# Altium PCB RELIA.PcbDoc (part 3 of 3)
Units mm, origin at the board's own origin, x right, y up, seen from the top; angles counter-clockwise.
Board outline 64.01 x 60 mm, 4 copper layers (Top Layer, GND, POWER, Bottom Layer), stack 1.457 mm thick; 143 components, 99 nets, 570 pads, 325 vias.
Unrouted connection lines stored in the file: 1.
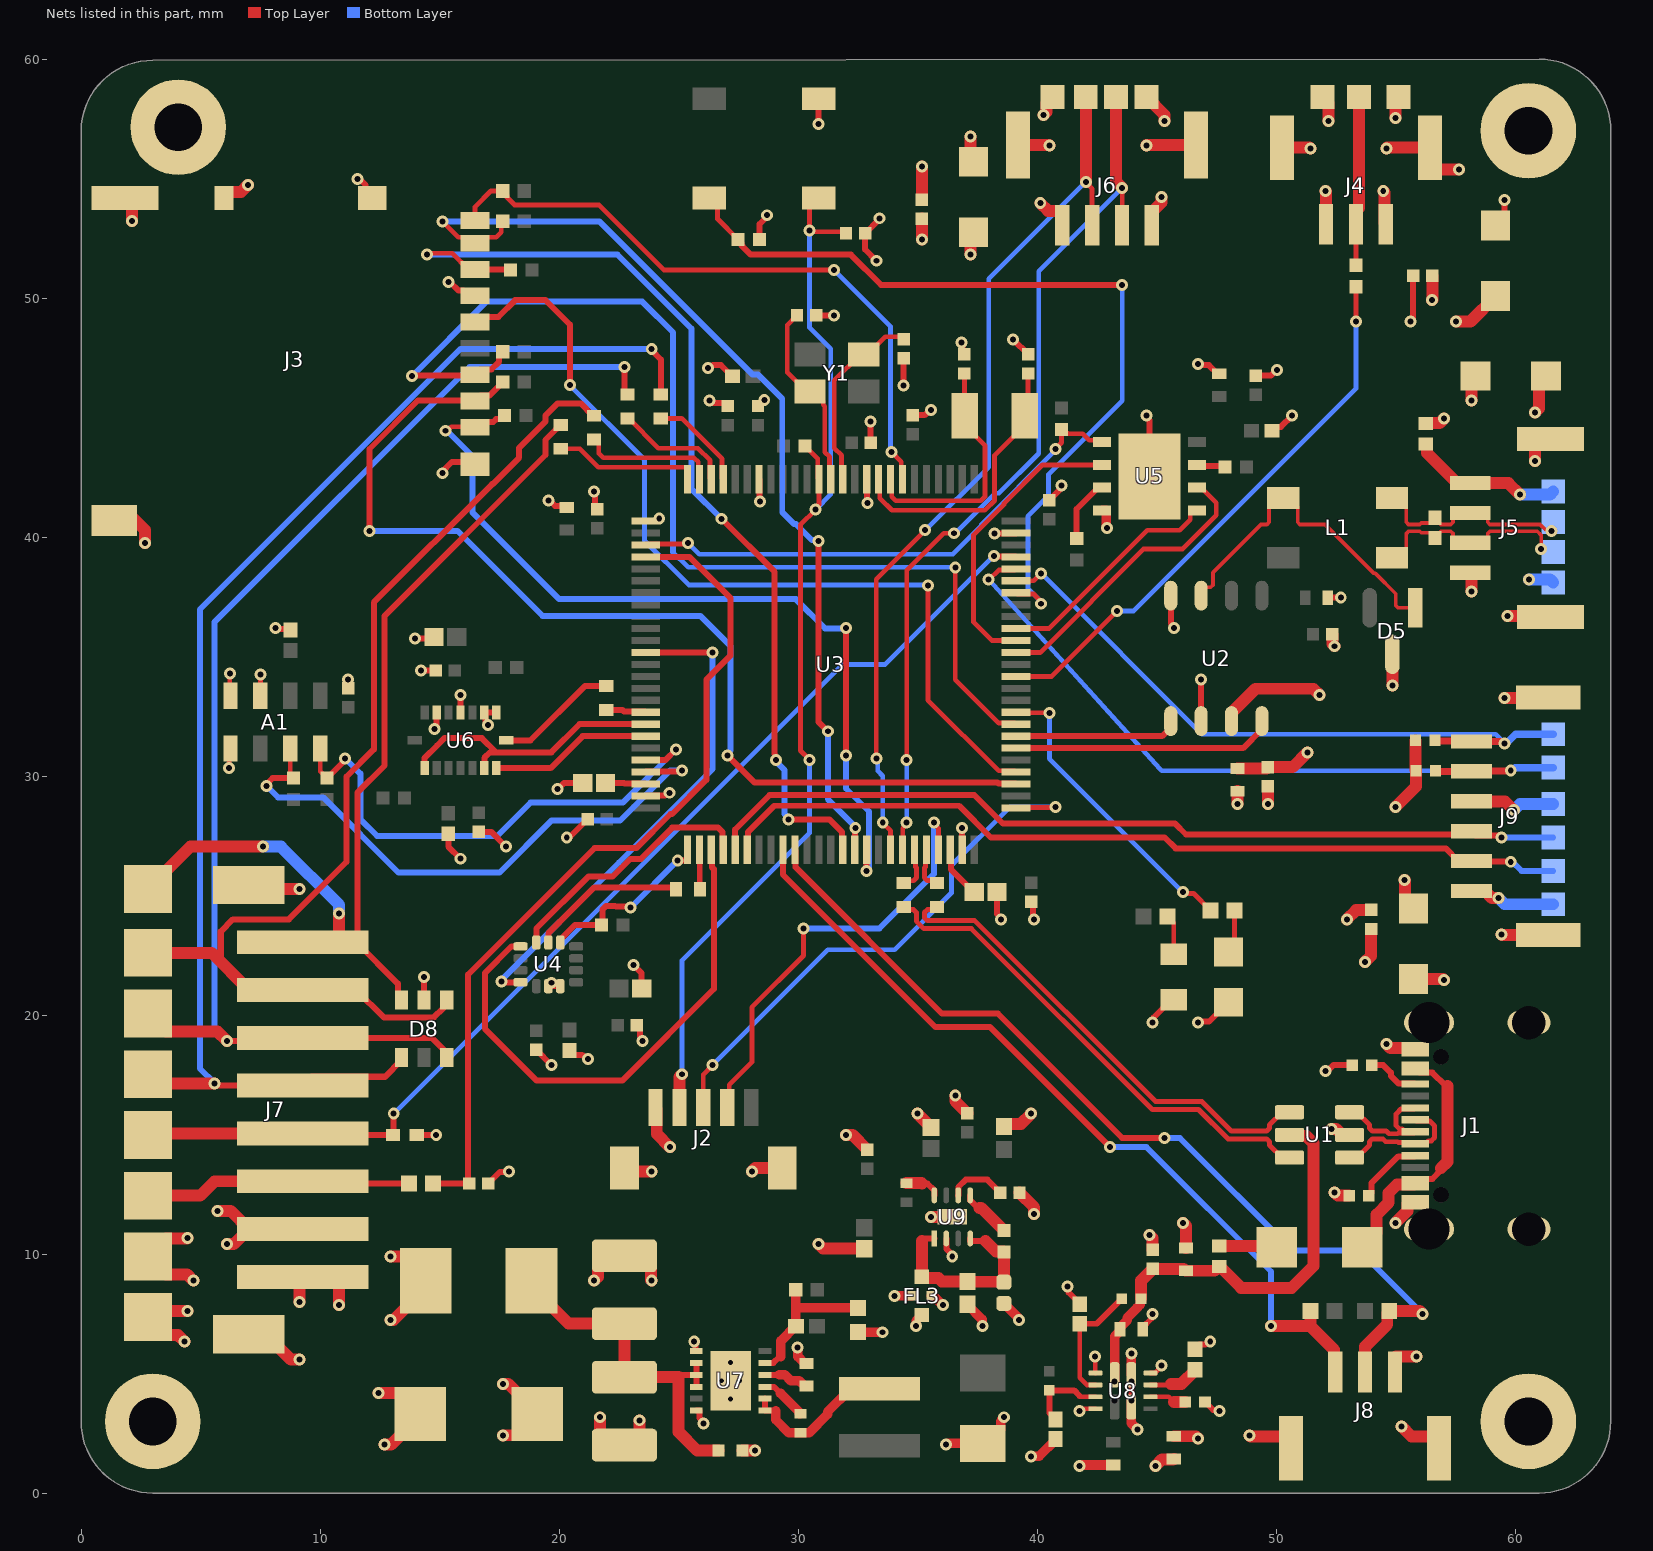
[diagram p4: the nets of this part, all layers, seen from the top]

## Via types
v1: diameter 0.5, hole 0.25, Top Layer to Bottom Layer, tented both sides, 323 vias
v2: diameter 0.5, hole 0.25, Top Layer to Bottom Layer, 2 vias

## Nets (pads, with @x,y where several pads share a name; then routed paths per layer and width w, separated by ;. In a path a pad name is that pad's centre, name@x,y a point inside that pad or via, vN(x,y) a via of type N, cw(c..) or ccw(c..) an arc to the next point about the centre after c; other vN are vias at no path point) (continued)
CAN1_P: D5.1 L1.1 U2.7 | length 14
  Top Layer w0.154: U2.7@46.863,37.55 46.863,37.721 47.046,37.904 47.267,37.904 47.357,37.994 47.357,38.514 49.37,40.527 49.615,40.527 49.705,40.617 49.705,41.263 50.078,41.636 L1.1@50.303,41.636 50.528,41.636 50.901,41.263 50.901,40.617 50.991,40.527 52.049,40.527 54.093,38.482 54.153,38.482 55.005,37.63 55.005,37.134 55.095,37.043 D5.1@55.814,37.043
CAN2_N: J5.3 L1.3 pad.MH15@61.595,39.37 R12.1 | length 8.6
  Top Layer w0.154: L1.3@54.853,39.136 55.078,39.136 55.451,39.509 55.451,40.155 55.541,40.245 56.007,40.245 56.069,40.184 56.444,40.184 R12.1@56.642,39.986 ; R12.1@56.642,39.961 R12.1@56.642,39.986 ; v1(61.087,39.497) 61.087,40.085 60.927,40.245 58.947,40.245 58.857,40.155 58.857,39.984 58.634,39.761 J5.3@58.127,39.761 57.62,39.761 57.397,39.984 57.397,40.155 57.307,40.245 56.901,40.245 R12.1@56.642,39.986
CAN2_P: J5.2 L1.4 pad.MH15@61.595,40.64 R12.2 | length 8.5
  Top Layer w0.154: L1.4@54.853,41.636 55.078,41.636 55.451,41.263 55.451,40.617 55.541,40.527 56.007,40.527 56.069,40.588 56.444,40.588 R12.2@56.642,40.786 ; R12.2@56.642,40.811 R12.2@56.642,40.786 ; v1(61.53,40.247) 61.464,40.313 61.257,40.313 61.043,40.527 58.947,40.527 58.857,40.617 58.857,40.788 58.634,41.011 J5.2@58.127,41.011 57.62,41.011 57.397,40.788 57.397,40.617 57.307,40.527 56.901,40.527 R12.2@56.642,40.786
CURR: J7.3 pad.MH9 R28.1 | length 11.2
  Top Layer w0.25: J7.3@9.271,13.049 9.366,12.954 R28.1@13.72,12.954
  Top Layer w0.5: pad.MH9@2.794,12.446 4.981,12.446 5.584,13.049 J7.3@9.271,13.049
GND: A1.3 A1.4 A1.5 C1.2 C2.2 C3.2 C4.2 C5.2 C6.2 C7.2 C8.2 C9.2 C10.2 C11.2 C12.2 C13.2 C14.2 C15.2 C16.2 C17.2 C18.2 C19.2 C20.2 C21.1 C22.1 C23.2 C24.2 C25.2 C26.2 C27.2 C28.1 C29.1 C30.2 C31.2 C32.2 C33.2 C34.2 C35.2 C36.2 C37.2 C38.2 C39.2 C41.1 C42.1 C43.2 C45.2 C46.1 C47.2 C48.2 C49.1 C50.1 C51.2 C52.2 C53.1 C54.2 C55.2 C56.2 C57.2 C58.2 C59.2 D2.2 D3.2 D4.2 D5.3 D6.1 D7.2 D8.2 D10.2 D11.1 D12.2 FL3.3 FL3.4 J1.1 J1.2 J1.3 J1.4 J1.A1-B12 J1.B1-A12 J2.5 J2.6 J2.7 J3.6 J3.P1 J3.P2 J3.P3 J3.P4 J3.SWA J4.3 J4.4 J4.5 J5.4 J5.5 J5.6 J6.4 J6.5 J6.6 J7.2 J7.9 J7.10 J8.3 J8.4 J8.5 J9.4 J9.7 J9.8 pad.MH4 pad.MH10 pad.MH15@44.577,58.42 pad.MH15@51.943,58.42 pad.MH15@61.595,28.829 pad.MH15@61.595,38.1 R9.2 R10.2 R18.1 R34.1 R39.2 R40.2 R41.2 S2.2 U1.2 U2.2 U2.8 U3.10 U3.19 U3.26 U3.49 U3.74 U3.99 U4.6 U4.7 U5.4 U5.9 U6.2 U6.4 U6.6 U6.7 U7.7 U7.12 U7.13 U7.V U8.3 U8.6 U8.12 U9.2 U9.9 | length 172.5
  Top Layer w0.2: v1(6.197,30.333) 6.197,31.102 A1.5@6.253,31.158 ; v1(6.223,34.29) 6.223,33.388 A1.4@6.253,33.358 ; A1.3@7.503,33.358 v1(7.503,34.243) ; v1(41.783,3.429) 41.864,3.429 41.963,3.528 U8.6@42.442,3.528 ; v1(42.418,5.715) 42.43,5.703 42.43,5.028 U8.3@42.442,5.028 ; U8.12@44.742,5.028 44.942,5.028 45.212,5.298 v1(45.212,5.334)
  Top Layer w0.25: v1(8.128,36.195) 8.168,36.155 8.723,36.155 C38.2@8.763,36.116 ; C37.2@11.176,33.674 v1(11.176,34.036) ; v1(11.557,54.991) 11.605,54.943 11.696,54.943 11.909,54.731 11.909,54.471 J3.P1@12.184,54.196 ; v1(13.974,35.75) 14.7,35.75 C31.2@14.763,35.814 ; D7.2@14.05,14.986 v1(14.859,14.986) ; v1(14.224,34.417) C30.2@14.84,34.417 ; D8.2@14.351,20.631 v1(14.351,21.59) ; v1(14.781,31.98) 14.781,32.047 14.875,32.141 U6.2@14.875,32.661 ; v1(15.113,42.672) 15.113,42.74 15.514,43.141 J3.P4@16.743,43.141 ; C36.2@15.367,27.591 15.367,27.051 v1(15.875,26.543) ; v1(15.367,50.673) 15.435,50.673 15.787,50.321 16.009,50.321 16.289,50.041 J3.6@16.539,50.041 ; U6.4@15.875,32.661 v1(15.875,33.401) ; C35.2@16.637,27.667 17.164,27.667 v1(17.78,27.051) ; v1(17.027,32.147) 17.027,32.189 16.925,32.292 16.925,32.611 U6.6@16.875,32.661 U6.7@17.375,32.661 ; C39.2@17.037,12.954 17.526,13.443 17.888,13.443 v1(17.907,13.462) ; C24.2@19.042,18.549 v1(19.685,17.907) ; U4.6@19.55,21.209 19.55,21.35 U4.6@19.554,21.354 ; v1(19.558,41.529) 19.607,41.529 19.829,41.307 20.255,41.307 C20.2@20.32,41.242 ; v1(19.675,21.354) U4.6@19.554,21.354 ; v1(19.939,29.464) 19.955,29.464 20.209,29.718 C9.2@20.986,29.718 ; U4.7@20.05,21.209 19.6,21.209 19.554,21.255 U4.6@19.554,21.354 ; v1(20.32,27.432) 20.368,27.48 20.476,27.48 C18.2@21.19,28.194 ; C27.2@20.439,18.52 20.439,18.499 20.6,18.338 20.965,18.338 21.141,18.161 v1(21.209,18.161) ; v1(21.463,41.91) 21.511,41.862 21.511,41.246 C17.2@21.59,41.167 ; v1(23.114,22.098) 23.456,21.756 C26.2@23.456,21.108 ; C25.2@23.252,19.584 23.387,19.449 23.387,19.099 23.495,18.991 v1(23.495,18.923) ; U3.49@23.619,29.171 23.644,29.196 24.438,29.196 24.545,29.303 v1(24.612,29.303) ; U3.26@23.619,40.671 24.069,40.671 24.169,40.771 v1(24.19,40.771) ; v1(25.654,6.35) 25.699,6.305 25.699,5.949 U7.7@25.743,5.949 ; U7.12@25.743,3.449 25.883,3.449 25.883,3.141 26.035,2.989 v1(26.035,2.921) ; v1(26.238,47.066) 26.305,47.066 26.436,47.196 26.776,47.196 27.236,46.736 C13.2@27.257,46.736 ; v1(26.289,45.72) 26.357,45.72 26.457,45.62 26.916,45.62 C11.2@27.051,45.485 ; C12.2@28.321,45.485 28.565,45.729 v1(28.584,45.729) ; U3.19@28.369,42.421 28.391,42.399 28.391,41.513 v1(28.413,41.491) ; R18.1@28.39,52.451 28.39,53.101 28.702,53.413 v1(28.702,53.467) ; C22.1@30.753,49.276 v1(31.496,49.276) ; v1(30.861,57.277) S2.2@30.861,58.336 ; U3.10@32.869,42.421 32.89,42.4 32.89,41.44 v1(32.911,41.419) ; v1(33.02,44.831) 33.029,44.822 33.029,43.951 C14.2@33.039,43.942 ; v1(33.274,51.562) 32.804,52.032 C23.2@32.804,52.705 33.401,53.302 v1(33.401,53.34) ; v1(34.417,46.336) C21.1@34.417,47.479 ; C15.2@34.798,45.104 35.298,45.104 35.514,45.32 v1(35.56,45.32) ; U9.2@36.199,10.655 36.203,10.651 36.203,10.22 36.449,9.974 v1(36.449,9.906) ; v1(36.83,48.133) 36.878,48.085 36.878,47.723 C28.1@36.957,47.644 ; v1(36.854,27.821) 36.862,27.814 36.862,26.928 U3.74@36.869,26.921 ; v1(38.211,40.149) 38.222,40.16 39.108,40.16 U3.99@39.119,40.171 ; C10.2@38.323,25.146 38.323,24.229 38.481,24.071 v1(38.481,24.003) ; v1(38.989,48.26) 39.008,48.26 C29.1@39.624,47.644 ; C19.2@39.751,24.746 39.83,24.667 39.83,24.051 v1(39.878,24.003) ; C16.2@40.513,41.548 40.973,42.008 40.973,42.116 v1(41.021,42.164) ; v1(41.275,8.636) 41.323,8.588 41.323,8.393 41.783,7.933 R41.2@41.783,7.9 ; C48.2@44.417,6.858 44.417,6.933 44.788,7.304 44.788,7.441 v1(44.835,7.489) ; v1(44.577,45.085) 44.577,45.017 44.704,44.89 U5.9@44.704,42.545 ; v1(44.831,19.685) 44.879,19.733 44.879,19.899 45.62,20.64 D11.1@45.72,20.64 ; U2.8@45.593,37.55 45.593,36.39 45.72,36.263 v1(45.72,36.195) ; C50.1@46.609,6.018 46.609,6.038 46.794,6.223 47.049,6.223 47.176,6.35 v1(47.244,6.35) ; v1(46.736,19.685) 46.784,19.733 47.199,19.733 D6.1@48.006,20.54 ; v1(46.736,47.244) 46.784,47.196 47.184,47.196 47.55,46.83 C34.2@47.625,46.83 ; U2.2@46.863,32.3 v1(46.863,34.036) ; R40.2@47.023,3.81 47.031,3.81 47.364,3.477 47.577,3.477 v1(47.625,3.429) ; C32.2@49.149,46.755 49.776,46.755 50.011,46.99 v1(50.038,46.99) ; C33.2@49.832,44.45 49.993,44.611 50.199,44.611 v1(50.673,45.085) ; v1(52.07,17.653) 52.138,17.653 52.392,17.907 R10.2@53.18,17.907 ; C7.2@52.164,37.465 v1(52.705,37.465) ; C8.2@52.353,35.931 C8.2@52.364,35.942 ; v1(55.626,49.022) 55.626,49.09 55.734,49.198 C59.2@55.734,50.927 ; D2.2@59.182,53.037 59.563,53.418 v1(59.563,54.102)
  Top Layer w0.4: v1(29.972,6.096) 29.991,6.077 29.991,5.715 30.278,5.428 C46.1@30.353,5.428 ; R34.1@32.512,6.737 32.515,6.734 33.525,6.734 v1(33.528,6.731) ; v1(34.036,8.255) FL3.4@34.779,8.255 ; FL3.3@35.579,8.255 35.66,8.255 36.041,7.874 v1(36.068,7.874) ; v1(36.195,2.032) 36.222,2.032 36.27,2.08 C45.2@37.719,2.08 ; C54.2@37.084,7.903 37.084,7.882 37.7,7.266 37.7,7.004 v1(37.719,6.985) ; C45.2@37.895,2.08 38.472,2.658 38.472,3.012 38.608,3.148 v1(38.608,3.175) ; C53.1@38.608,7.938 39.224,7.322 39.224,7.258 v1(39.243,7.239) ; v1(39.751,1.524) 39.77,1.543 40.083,1.543 40.767,2.227 R39.2@40.767,2.26 ; v1(41.783,1.143) 41.81,1.143 41.843,1.176 C47.2@43.18,1.176 ; U5.4@42.719,41.12 42.889,41.12 42.899,41.11 42.899,40.44 42.926,40.413 v1(42.926,40.386)
  Top Layer w0.5: J3.P2@1.834,54.196 1.873,54.196 2.123,53.946 2.123,53.239 v1(2.134,53.228) ; J3.P3@2.084,40.885 2.667,40.302 v1(2.667,39.751) ; v1(4.445,10.668) 4.433,10.656 3.544,10.656 pad.MH10@2.794,9.906 3.544,9.156 4.433,9.156 v1(4.699,8.89) ; v1(5.715,11.811) 6.259,11.811 J7.2@7.021,11.049 ; J3.SWA@5.984,54.196 5.984,54.296 6.134,54.446 6.694,54.446 v1(6.985,54.737) ; v1(6.096,10.414) 6.386,10.414 J7.2@7.021,11.049 ; J7.9@7.021,6.649 7.721,6.649 8.782,5.588 v1(9.144,5.588) ; J7.10@7.021,25.449 7.197,25.273 v1(9.144,25.273) ; J7.2@9.271,11.049 J7.2@7.021,11.049 ; v1(17.653,2.413) 17.662,2.422 18.257,2.422 19.087,3.252 D10.2@19.087,3.302 19.087,3.352 17.867,4.572 v1(17.653,4.572) ; v1(21.463,8.89) 21.623,9.05 21.623,9.494 22.058,9.929 C42.1@22.733,9.929 23.408,9.929 23.843,9.494 23.843,8.923 v1(23.876,8.89) ; v1(21.717,3.175) 21.717,2.444 22.152,2.009 C41.1@22.733,2.009 22.933,2.009 23.368,2.444 v1(23.368,3.048) ; J2.7@22.735,13.601 22.874,13.462 v1(23.876,13.462) ; J2.5@24.035,16.126 24.085,16.076 24.085,15.031 v1(24.638,14.478) ; C43.2@27.678,1.778 v1(28.194,1.778) ; v1(28.067,13.462) 28.206,13.601 J2.6@29.335,13.601 ; v1(30.861,10.414) 31.046,10.229 C51.2@32.766,10.229 ; v1(32.004,14.986) 32.277,14.986 C52.2@32.893,14.37 ; v1(34.994,15.875) 35.56,15.309 C57.2@35.56,15.298 ; C5.2@35.179,54.121 v1(35.179,55.499) ; v1(35.56,11.557) U9.9@36.449,11.557 ; v1(36.576,16.637) 36.576,16.402 C56.2@37.084,15.894 ; v1(37.211,56.769) 37.211,55.831 D4.2@37.338,55.704 ; C55.2@38.608,15.338 38.608,15.359 38.694,15.445 39.321,15.445 v1(39.751,15.875) ; J6.6@39.201,56.397 40.504,56.397 v1(40.513,56.388) ; C58.2@39.262,12.573 39.878,11.957 v1(39.878,11.684) ; v1(44.577,56.388) 44.586,56.397 J6.5@46.651,56.397 ; pad.MH15@44.577,58.42 45.339,57.658 v1(45.339,57.404) ; v1(44.704,10.795) 44.821,10.678 44.821,10.189 C2.2@44.831,10.179 ; J6.4@44.801,53.047 44.801,53.597 45.212,54.008 v1(45.212,54.229) ; v1(44.958,1.143) 45.22,1.405 45.695,1.405 C49.1@45.72,1.43 ; v1(46.101,11.303) 46.228,11.176 C1.2@46.228,10.254 ; v1(48.387,28.829) C3.2@48.387,29.37 ; v1(48.895,2.413) 48.931,2.377 J8.4@50.621,2.377 ; v1(49.657,28.829) C4.2@49.657,29.572 ; J4.5@50.24,56.297 51.399,56.297 v1(51.435,56.261) ; pad.MH15@51.943,58.42 52.193,58.17 52.193,57.408 v1(52.197,57.404) ; v1(52.07,54.483) 52.09,54.463 J4.3@52.09,53.097 ; v1(52.324,15.24) 52.507,15.24 52.761,14.986 U1.2@53.071,14.986 ; C8.2@52.353,35.931 52.353,35.531 v1(52.451,35.433) ; v1(52.451,12.573) 52.578,12.446 R9.2@53.053,12.446 ; v1(53.721,22.225) 53.975,22.479 C6.2@53.975,23.603 ; v1(54.61,18.796) 54.787,18.619 55.774,18.619 J1.B1-A12@55.824,18.569 ; v1(54.61,56.261) 54.646,56.297 J4.4@56.44,56.297 56.44,55.622 56.69,55.372 v1(57.658,55.372) ; v1(54.864,33.782) D5.3@54.864,35.093 ; J8.3@54.971,5.577 54.971,5.665 55.021,5.715 v1(55.88,5.715) ; v1(54.991,11.303) 55.499,11.811 55.499,12.119 55.549,12.169 J1.A1-B12@55.824,12.169 ; v1(55.245,2.794) 55.662,2.377 J8.5@56.821,2.377 ; D12.2@55.753,21.512 56.974,21.512 v1(57.023,21.463) ; J5.4@58.127,38.511 58.166,38.472 v1(58.166,37.719) ; J9.4@58.177,28.946 59.573,28.946 v1(59.944,28.575) ; v1(59.436,23.368) 59.458,23.346 J9.7@61.377,23.346 ; v1(59.563,33.274) 61.355,33.274 J9.8@61.377,33.296 ; v1(59.69,36.703) 61.435,36.703 J5.5@61.477,36.661 ; v1(60.833,43.18) 60.833,43.861 61.083,44.111 J5.6@61.477,44.111 ; v1(60.833,45.212) 60.997,45.376 60.997,46.441 D3.2@61.292,46.736
  Bottom Layer w0.5: v1(59.944,28.575) 60.198,28.829 pad.MH15@61.595,28.829 ; v1(60.579,38.227) 61.468,38.227 pad.MH15@61.595,38.1
GPS_SCL: J9.6 pad.MH15@61.595,31.75 R13.2 U3.95 | length 28.7
  Top Layer w0.2: U3.95@39.119,38.171 39.86,38.171 v1(40.167,38.478)
  Top Layer w0.3: R13.2@56.642,31.496 56.667,31.471 58.152,31.471 J9.6@58.177,31.446 59.432,31.446 59.509,31.369 v1(59.563,31.369)
  Bottom Layer w0.2: v1(40.167,38.478) 46.895,31.75 59.182,31.75 v1(59.563,31.369)
  Bottom Layer w0.25: v1(59.563,31.369) v1@59.631,31.369
  Bottom Layer w0.3: v1@59.631,31.369 60.012,31.75 pad.MH15@61.595,31.75
GPS_SDA: J9.5 pad.MH15@61.595,30.353 R14.2 U3.96 | length 31.7
  Top Layer w0.2: v1(37.973,38.227) 38.001,38.227 38.395,38.621 39.069,38.621 U3.96@39.119,38.671
  Top Layer w0.3: R14.2@56.663,30.226 56.693,30.196 J9.5@58.177,30.196 58.192,30.211 59.802,30.211 v1(59.817,30.226)
  Bottom Layer w0.2: v1(37.973,38.227) 45.153,30.285 45.212,30.226 45.253,30.226 v1(59.817,30.226)
  Bottom Layer w0.3: v1(59.817,30.226) 59.871,30.226 59.998,30.353 pad.MH15@61.595,30.353
ICM42INT: U3.37 U4.4 | length 21
  Top Layer w0.25: v1(17.582,21.407) 17.615,21.374 U4.4@18.385,21.374 ; U3.37@23.619,35.171 23.623,35.175 26.412,35.175 v1(26.416,35.179)
  Bottom Layer w0.25: v1(17.582,21.407) 17.582,21.459 22.508,26.385 26.416,30.293 v1(26.416,35.179)
MCU_STATUS: R17.2 U3.84 | length 12.7
  Top Layer w0.2: U3.84@39.119,32.671 39.135,32.655 40.497,32.655 v1(40.513,32.639) ; v1(46.101,25.146) 46.158,25.089 46.547,25.089 47.248,24.388 R17.2@47.248,24.384
  Bottom Layer w0.2: v1(40.513,32.639) 40.513,30.734 v1(46.101,25.146)
NetC9_1: C9.1 U3.48 | length 1.7
  Top Layer w0.25: C9.1@21.94,29.718 22.717,29.718 22.739,29.696 23.594,29.696 U3.48@23.619,29.671
NetC10_1: C10.1 U3.73 | length 2.2
  Top Layer w0.25: U3.73@36.369,26.921 36.394,26.896 36.394,26.098 37.346,25.146 C10.1@37.369,25.146
NetC21_2: C21.2 U3.12 Y1.3 | length 8
  Top Layer w0.2: U3.12@31.869,42.421 31.819,42.471 31.819,43.418 31.515,43.722 31.515,46.555 32.598,47.638 Y1.3@32.748,47.638 32.898,47.638 33.647,48.387 34.309,48.387 C21.2@34.417,48.279
NetC22_2: C22.2 U3.13 Y1.1 | length 8
  Top Layer w0.2: C22.2@29.953,49.276 29.548,48.871 29.548,46.888 30.348,46.088 30.648,46.088 31.048,45.688 31.048,45.538 31.115,45.471 31.115,43.556 31.319,43.352 31.319,42.471 U3.13@31.369,42.421
NetC28_2: C28.2 U3.8 Y2.1 | length 10.3
  Top Layer w0.2: U3.8@33.869,42.421 33.919,42.371 33.919,41.697 34.095,41.521 37.643,41.521 37.819,41.697 37.819,43.843 36.977,44.685 Y2.1@36.977,45.085 36.957,45.105 C28.2@36.957,46.844
NetC29_2: C29.2 U3.9 Y2.2 | length 11.9
  Top Layer w0.2: U3.9@33.369,42.421 33.419,42.371 33.419,41.631 33.929,41.121 37.809,41.121 37.836,41.148 38.219,41.531 38.219,43.427 39.477,44.685 Y2.2@39.477,45.085 39.624,45.232 C29.2@39.624,46.844
NetC39_1: C39.1 R28.2 U3.29 | length 35.6
  Top Layer w0.25: R28.2@14.728,12.954 C39.1@16.237,12.954 16.196,12.995 16.196,21.7 21.48,26.984 23.233,26.984 24.663,28.415 24.732,28.415 26.162,29.845 26.162,34.036 27.178,35.052 27.178,37.444 25.451,39.171 U3.29@23.901,39.171
NetC40_1: C40.1 L2.1 U7.1 U7.2 | length 6.7
  Top Layer w0.25: U7.2@28.613,3.949 U7.1@28.613,3.449 29.063,3.449
  Top Layer w0.4: 29.063,3.449 29.063,3.068 29.61,2.521 C40.1@30.099,2.521 30.461,2.521 31.242,3.302 31.242,3.411 32.191,4.36 L2.1@33.401,4.36
NetC40_2: C40.2 U7.3 | length 2
  Top Layer w0.25: U7.3@28.613,4.449 28.992,4.449 29.265,4.177
  Top Layer w0.4: 29.265,4.177 30.049,3.392 30.049,3.321 C40.2@30.099,3.321
NetC41_2: C41.2 C42.2 C43.1 D9.1 U7.8 U7.9 U7.10 | length 15.4
  Top Layer w0.25: 24.996,4.849 25.096,4.949 U7.9@25.743,4.949 ; U7.10@25.743,4.449 U7.9@25.743,4.949 ; U7.8@25.743,5.449 U7.9@25.743,4.949
  Top Layer w0.5: D9.1@18.847,8.89 18.847,8.598 19.677,7.768 19.718,7.768 20.397,7.089 C42.2@22.733,7.089 C41.2@22.733,4.849 24.996,4.849 24.996,2.563 25.781,1.778 C43.1@26.678,1.778
NetC44_1: C44.1 R33.1 R34.2 U7.5 | length 6.5
  Top Layer w0.25: U7.5@28.613,5.449 28.963,5.449 29.229,5.715 29.337,5.715
  Top Layer w0.4: 29.278,5.715 29.278,6.37 29.893,6.985 C44.1@29.913,6.985 29.908,6.99 29.908,7.747 ; R33.1@29.903,8.509 29.908,8.504 29.908,7.747 ; R34.2@32.512,7.741 32.506,7.747 29.908,7.747
NetC46_2: C46.2 U7.4 | length 1.9
  Top Layer w0.25: U7.4@28.613,4.949 29.206,4.949 29.21,4.953
  Top Layer w0.4: 29.21,4.953 29.444,4.953 29.698,4.699 30.057,4.699 30.278,4.478 C46.2@30.353,4.478
NetC50_2: C50.2 U8.11 | length 2.1
  Top Layer w0.2: U8.11@44.742,4.528 45.549,4.528 45.593,4.572
  Top Layer w0.5: 45.593,4.572 46.043,4.572 46.609,5.138 C50.2@46.609,5.158
NetC53_2: C53.2 C54.1 FL3.2 R43.1 U9.1 U9.4 | length 8.5
  Top Layer w0.25: 35.179,10.541 35.293,10.655 U9.1@35.699,10.655 ; U9.4@37.199,10.655 37.199,10.545 37.203,10.541 37.846,10.541
  Top Layer w0.5: 35.179,10.541 FL3.2@35.179,9.055 35.229,9.005 35.865,9.005 36.01,8.861 C54.1@37.084,8.861 37.101,8.844 38.591,8.844 C53.2@38.608,8.826 R43.1@38.608,10.091 38.583,10.116 38.271,10.116 37.846,10.541
NetC58_1: C58.1 U9.6 | length 2.5
  Top Layer w0.25: U9.6@36.699,12.459 36.703,12.463 36.703,12.807 37.014,13.118 37.917,13.118 C58.1@38.462,12.573
NetD1_1: D1.1 FL1.1 | length 2.4
  Top Layer w0.5: FL1.1@47.625,10.338 49.975,10.338 D1.1@50.026,10.287
NetD1_2: D1.2 J1.A4-B9 J1.B4-A9 | length 10.6
  Top Layer w0.25: J1.A4-B9@55.774,12.919 55.999,13.144 56.534,13.144 56.896,13.506 56.896,13.592 ; J1.B4-A9@55.824,17.769 55.999,17.594 56.42,17.594 56.534,17.594 57.09,17.037 57.169,17.037
  Top Layer w0.5: D1.2@53.606,10.287 53.616,10.287 54.206,10.877 54.206,11.654 54.709,12.158 54.709,12.565 55.063,12.919 J1.A4-B9@55.774,12.919 ; 56.896,13.592 57.169,13.865 57.169,17.037
NetD6_2: D6.2 R17.1 | length 1.8
  Top Layer w0.2: D6.2@48.006,22.64 48.256,22.89 R17.1@48.256,24.384
NetD11_2: D11.2 R42.1 | length 1.7
  Top Layer w0.2: R42.1@45.462,24.13 45.462,24.126 45.72,23.868 D11.2@45.72,22.54
NetFB1_1: FB1.1 U9.8 | length 1.5
  Top Layer w0.25: 35.179,12.954 35.409,12.954 35.699,12.664 U9.8@35.699,12.459
  Top Layer w0.5: FB1.1@34.544,12.973 35.16,12.973 35.179,12.954
NetFL2_1: FL2.1 J5.1 pad.MH15@61.595,41.91 | length 6.5
  Top Layer w0.5: FL2.1@56.261,43.891 56.291,43.891 56.311,43.871 56.311,43.527 57.577,42.261 J5.1@58.127,42.261 59.72,42.261 v1(60.198,41.783)
  Bottom Layer w0.5: v1(60.198,41.783) 61.468,41.783 pad.MH15@61.595,41.91
NetJ1_A5: J1.A5 R9.1 | length 2.9
  Top Layer w0.25: R9.1@53.881,12.446 53.889,12.446 54,12.557 54,12.98 55.114,14.094 55.799,14.094 J1.A5@55.824,14.119
NetJ1_B5: J1.B5 R10.1 | length 2.2
  Top Layer w0.25: R10.1@54.008,17.907 54.483,17.907 54.799,17.591 54.799,17.46 55.114,17.144 55.799,17.144 J1.B5@55.824,17.119
NetJ8_1: J8.1 R36.1 U3.59 | length 35.1
  Top Layer w0.25: U3.59@29.369,26.921 29.369,25.876 35.75,19.494 38.036,19.494 v1(43.053,14.478)
  Top Layer w0.5: v1(49.784,6.985) 51.439,6.985 R36.1@51.439,7.62 ; 51.522,6.898 52.421,5.999 52.421,5.119 J8.1@52.471,5.069
  Bottom Layer w0.25: v1(43.053,14.478) 44.577,14.478 49.784,9.271 v1(49.784,6.985)
NetJ8_2: J8.2 R37.1 U3.60 | length 38.6
  Top Layer w0.25: U3.60@29.869,26.921 29.894,26.896 29.894,26.186 36.014,20.066 38.354,20.066 43.561,14.859 v1(45.339,14.859)
  Top Layer w0.5: J8.2@53.721,5.577 53.721,6.127 54.65,7.056 54.65,7.537 R37.1@54.733,7.62 56.007,7.62 v1(56.134,7.493)
  Bottom Layer w0.25: v1(45.339,14.859) 45.974,14.859 50.673,10.16 53.467,10.16 v1(56.134,7.493)
NetR11_1: R11.1 U3.87 | length 23.5
  Top Layer w0.2: U3.87@39.119,34.171 40.605,34.171 v1(43.337,36.903) ; v1(53.34,49.022) R11.1@53.34,50.477
  Bottom Layer w0.2: v1(43.337,36.903) 44.031,36.903 53.34,46.212 v1(53.34,49.022)
NetR15_1: R15.1 U3.42 | length 1.7
  Top Layer w0.25: R15.1@21.971,32.766 22.646,32.766 22.716,32.696 23.594,32.696 U3.42@23.619,32.671
NetR16_1: R16.1 U3.52 | length 1.7
  Top Layer w0.25: U3.52@25.869,26.921 25.884,26.906 25.884,25.288 R16.1@25.9,25.273
NetR18_2: R18.2 S1.2 U3.94 | length 35.6
  Top Layer w0.2: S1.2@26.289,54.186 26.627,53.848 26.627,53.314 R18.2@27.49,52.451 ; U3.94@39.119,37.671 39.169,37.621 39.849,37.621 40.005,37.465 40.005,37.456 40.169,37.292 v1(40.169,37.211)
  Top Layer w0.25: R18.2@27.49,52.451 27.64,52.301 27.64,52.201 27.686,52.155 27.686,52.145 28.015,51.816 32.207,51.816 33.477,50.546 v2(43.561,50.546)
  Bottom Layer w0.2: v1(40.169,37.211) 40.112,37.268 40.112,37.358 39.617,37.853 39.617,40.871 40.471,41.725 40.471,42.614 43.561,45.704 v2(43.561,50.546)
NetR21_1: R21.1 U5.3 | length 2.7
  Top Layer w0.25: R21.1@41.656,39.947 41.656,41.177 42.549,42.07 U5.3@42.719,42.07
NetR23_1: R23.1 U5.7 | length 1.2
  Top Layer w0.25: U5.7@46.689,43.02 46.736,42.973 47.821,42.973 R23.1@47.868,42.926
NetR29_1: R29.1 U3.22 | length 4.1
  Top Layer w0.2: R29.1@24.257,44.966 25.13,44.966 26.819,43.277 26.819,42.471 U3.22@26.869,42.421
NetR30_1: R30.1 U3.23 | length 5
  Top Layer w0.2: R30.1@22.86,44.966 22.91,44.966 24.155,43.721 25.809,43.721 26.319,43.211 26.319,42.471 U3.23@26.369,42.421
NetR31_1: R31.1 U3.24 | length 5.7
  Top Layer w0.2: R31.1@21.463,44.077 21.513,44.077 21.663,43.927 21.663,43.502 21.844,43.321 25.643,43.321 25.819,43.145 25.819,42.471 U3.24@25.869,42.421
NetR32_1: R32.1 U3.25 | length 6.1
  Top Layer w0.2: R32.1@20.066,43.696 20.87,43.696 21.645,42.921 25.319,42.921 25.369,42.871 U3.25@25.369,42.421
NetR35_1: R35.1 R39.1 U8.5 | length 3.4
  Top Layer w0.2: 41.783,4.064 41.819,4.028 U8.5@42.442,4.028
  Top Layer w0.25: R39.1@40.767,3.074 40.767,3.107 40.513,3.361 R35.1@40.513,4.299 41.548,4.299 41.783,4.064
NetR38_1: R38.1 R41.1 U8.4 | length 5.2
  Top Layer w0.2: R41.1@41.783,7.086 41.783,4.826 42.081,4.528 U8.4@42.442,4.528
  Top Layer w0.25: R41.1@41.783,7.086 42.5,7.086 R38.1@43.542,8.128
NetR40_1: R40.1 U8.10 | length 1.5
  Top Layer w0.2: U8.10@44.742,4.028 45.502,4.028 45.72,3.81
  Top Layer w0.5: 45.72,3.81 R40.1@46.195,3.81
NetR43_2: R43.2 U9.5 | length 2.1
  Top Layer w0.25: U9.5@37.199,12.459 37.199,12.254 37.515,11.938 37.592,11.938
  Top Layer w0.5: 37.592,11.938 37.661,11.938 R43.2@38.608,10.991
NetU2_1: U2.1 U3.82 | length 6.9
  Top Layer w0.25: U3.82@39.119,31.671 45.233,31.671 45.593,32.031 U2.1@45.593,32.3
NetU2_4: U2.4 U3.81 | length 11
  Top Layer w0.25: U3.81@39.119,31.171 48.624,31.171 49.403,31.95 U2.4@49.403,32.3
NRST: C23.1 J2.4 R20.2 S2.1 U3.14 | length 46.1
  Top Layer w0.2: R20.2@30.295,43.815 30.47,43.64 30.47,43.635 30.819,43.286 30.819,42.471 U3.14@30.869,42.421 30.869,41.364 30.734,41.229 v1(30.734,41.148) 30.099,40.513 30.099,31.071 30.48,30.69 v1(30.48,30.674) ; S2.1@30.861,54.186 30.855,54.186 30.48,53.811 v1(30.48,52.832) 30.537,52.775 31.934,52.775 C23.1@32.004,52.705
  Top Layer w0.5: J2.4@25.035,16.126 25.035,17.415 v1(25.146,17.526)
  Bottom Layer w0.2: v1(25.146,17.526) 25.146,22.288 30.48,27.622 v1(30.48,30.674) ; v1(30.48,52.832) 30.48,48.768 31.369,47.879 31.369,41.783 v1(30.734,41.148)
PWM1: D8.4 J7.5 pad.MH7 R29.2 | length 56.9
  Top Layer w0.254: v1(5.588,17.145) 5.655,17.145 5.751,17.049 J7.5@9.271,17.049 9.644,17.422 12.717,17.422 13.401,18.106 D8.4@13.401,18.231 ; v1(23.876,47.879) 23.876,47.812 24.257,47.431 R29.2@24.257,45.966
  Top Layer w0.5: pad.MH7@2.794,17.526 3.175,17.145 v1(5.588,17.145)
  Bottom Layer w0.254: v1(5.588,17.145) 4.975,17.758 4.975,36.979 15.875,47.879 v1(23.876,47.879)
PWM2: D8.6 J7.6 pad.MH6 R30.2 | length 54
  Top Layer w0.254: v1(6.096,18.923) 9.145,18.923 J7.6@9.271,19.049 14.67,19.049 15.153,18.566 15.153,18.379 D8.6@15.301,18.231 ; v1(22.733,47.117) 22.733,46.089 22.856,45.966 R30.2@22.86,45.966
  Top Layer w0.5: pad.MH6@2.794,20.066 3.544,19.316 5.703,19.316 v1(6.096,18.923)
  Bottom Layer w0.254: v1(6.096,18.923) 5.588,19.431 5.588,36.449 16.256,47.117 v1(22.733,47.117)
PWM3: D8.1 J7.7 pad.MH5@2.794,22.606 R31.2 | length 46.1
  Top Layer w0.254: 5.842,22.479 5.842,23.495 6.35,24.003 8.69,24.003 11.105,26.418 11.105,29.974 12.248,31.117 12.248,37.267 17.2,42.219 17.219,42.219 18.329,43.329 18.329,43.729 19.439,44.839 19.439,45.093 19.939,45.593 20.897,45.593 21.413,45.077 R31.2@21.463,45.077 ; J7.7@9.525,21.049 11.521,21.049 12.666,19.904 14.761,19.904 15.153,20.296 15.153,20.483 D8.1@15.301,20.631
  Top Layer w0.5: pad.MH5@2.794,22.606 5.464,22.606 7.021,21.049 J7.7@9.525,21.049
PWM4: D8.3 J7.8 pad.MH5@2.794,25.273 R32.2 | length 41.6
  Top Layer w0.25: D8.3@13.401,20.631 13.251,20.781 13.251,21.319 11.521,23.049 11.182,23.049 11.557,23.424 11.557,29.303 12.7,30.446 12.7,36.703 19.431,43.434 19.431,44.071 19.891,44.531 19.891,44.571 20.016,44.696 R32.2@20.066,44.696
  Top Layer w0.5: pad.MH5@2.794,25.273 4.572,27.051 v1(7.62,27.051) ; J7.8@9.271,23.049 10.545,23.049 10.795,23.299 v1(10.795,24.257)
  Bottom Layer w0.5: v1(7.62,27.051) 8.356,27.051 10.795,24.612 v1(10.795,24.257)
RX: D7.1 J7.4 pad.MH8 U3.97 | length 46.9
  Top Layer w0.25: J7.4@9.271,15.049 9.334,14.986 D7.1@13.05,14.986 13.066,15.001 13.066,15.86 v1(13.081,15.875) ; v1(38.193,39.211) 38.213,39.191 39.099,39.191 U3.97@39.119,39.171
  Top Layer w0.5: pad.MH8@2.794,14.986 2.857,15.049 J7.4@9.271,15.049
  Bottom Layer w0.2: v1(13.081,15.875) 31.877,34.671 33.639,34.671 38.179,39.211 v1(38.193,39.211)
SCL: A1.8 R25.2 U3.46 | length 21.8
  Top Layer w0.2: A1.8@10.003,31.158 10.003,30.198 R25.2@10.287,29.914
  Top Layer w0.25: R25.2@10.287,29.914 11.049,30.676 v1(11.049,30.734) ; U3.46@23.619,30.671 24.448,30.671 v1(24.892,31.115)
  Bottom Layer w0.25: v1(11.049,30.734) 11.684,30.099 11.684,28.195 12.387,27.492 17.408,27.492 18.805,28.889 22.666,28.889 v1(24.892,31.115)
SD_CLK: J3.5 U3.79 | length 37.5
  Top Layer w0.2: v1(35.433,37.973) 35.433,33.183 38.395,30.221 39.069,30.221 U3.79@39.119,30.171
  Top Layer w0.25: J3.5@16.484,48.996 16.697,49.209 17.459,49.209 18.161,49.911 19.431,49.911 20.447,48.895 v1(20.447,46.355)
  Bottom Layer w0.2: v1(20.447,46.355) 23.573,43.229 23.573,39.854 25.427,38 35.406,38 v1(35.433,37.973)
SD_CMD: J3.3 R6.2 U3.83 | length 46.4
  Top Layer w0.2: v1(36.576,38.735) 36.576,34.04 38.395,32.221 39.069,32.221 U3.83@39.119,32.171
  Top Layer w0.25: v1(13.843,46.736) 13.873,46.766 J3.3@16.484,46.766 ; J3.3@16.484,46.796 16.709,47.021 17.171,47.021 17.492,47.342 17.492,47.602 R6.2@17.642,47.752
  Bottom Layer w0.2: 24.765,39.37 25.4,38.735 v1(36.576,38.735)
  Bottom Layer w0.25: v1(13.843,46.736) 16.958,49.851 23.479,49.851 24.765,48.565 24.765,39.37
SD_D1: J3.8 R3.2 U3.65 | length 41.3
  Top Layer w0.2: v1(15.113,53.213) 15.78,52.546 15.984,52.546 16.111,52.419 16.111,52.215 16.653,52.215 16.984,52.546 17.367,52.546 17.576,52.755 17.576,53.147 R3.2@17.642,53.213
  Top Layer w0.25: v1(30.861,39.831) 30.861,32.258 v1(31.242,31.877) ; U3.65@32.369,26.921 32.38,26.932 32.38,27.819 v1(32.392,27.83)
  Bottom Layer w0.25: v1(15.113,53.213) 21.685,53.213 28.102,46.796 28.331,46.796 29.337,45.79 29.337,41.04 29.833,40.543 29.913,40.543 30.578,39.879 30.813,39.879 v1(30.861,39.831) ; v1(31.242,31.877) 31.242,29.038 32.392,27.888 v1(32.392,27.83)
SD_D2: J3.1 R4.2 U3.66 | length 35.7
  Top Layer w0.2: v1(15.24,44.45) 15.321,44.45 15.484,44.613 J3.1@16.312,44.613
  Top Layer w0.25: J3.1@16.484,44.596 16.703,44.815 17.245,44.815 17.365,44.935 17.561,44.935 17.642,45.016 R4.2@17.642,45.212 ; v1(32.004,30.861) v1(32.004,36.195) ; v1(32.869,26.038) U3.66@32.869,26.921
  Bottom Layer w0.25: v1(15.24,44.45) 15.308,44.45 16.383,43.375 16.383,41.021 20.003,37.401 29.909,37.401 31.127,36.183 31.992,36.183 v1(32.004,36.195) ; v1(32.004,30.861) 32.004,29.484 32.967,28.521 32.967,26.204 32.869,26.106 v1(32.869,26.038)
SD_D3: J3.2 R5.2 U3.78 | length 44.5
  Top Layer w0.25: v1(12.065,40.259) 12.065,43.688 14.096,45.719 16.461,45.719 J3.2@16.484,45.696 16.709,45.921 17.081,45.921 R5.2@17.642,46.482 ; v1(27.043,30.869) 28.183,29.729 38.351,29.729 38.384,29.696 39.094,29.696 U3.78@39.119,29.671
  Bottom Layer w0.25: v1(12.065,40.259) 15.748,40.259 19.304,36.703 25.908,36.703 27.178,35.433 27.178,31.071 27.043,30.937 v1(27.043,30.869)
SD_DETECT: J3.SWB R8.1 U3.7 | length 27.2
  Top Layer w0.2: J3.SWB@16.484,53.246 16.484,53.816 17.151,54.483 R8.1@17.638,54.483 17.822,54.299 17.822,54.209 18.134,53.897 21.668,53.897 24.384,51.181 v1(31.496,51.181) ; v1(33.909,43.561) 34.319,43.151 34.319,42.471 U3.7@34.369,42.421
  Bottom Layer w0.2: v1(31.496,51.181) 33.867,48.81 33.867,43.603 v1(33.909,43.561)
SD_DO: J3.7 R2.2 U3.64 | length 41.6
  Top Layer w0.2: v1(14.478,51.816) 14.535,51.873 15.532,51.873 16.21,51.196 J3.7@16.484,51.196
  Top Layer w0.25: J3.7@16.484,51.196 16.492,51.189 17.958,51.189 R2.2@17.965,51.181 ; v1(26.797,40.767) 29.015,38.549 29.015,30.918 29.035,30.899 29.035,30.722 v1(29.083,30.674) ; v1(29.591,28.185) 29.6,28.194 31.306,28.194 31.844,27.656 31.844,26.946 U3.64@31.869,26.921
  Bottom Layer w0.25: v1(14.478,51.816) 22.445,51.816 25.536,48.725 25.536,42.028 v1(26.797,40.767) ; v1(29.083,30.674) 29.083,30.606 29.439,30.251 29.439,28.405 29.591,28.253 v1(29.591,28.185)
SDA: A1.7 R24.2 U3.47 | length 24.8
  Top Layer w0.2: R24.2@8.753,30.051 A1.7@8.753,31.158
  Top Layer w0.25: v1(7.76,29.591) 7.76,29.659 8.011,29.909 8.011,29.914 R24.2@8.89,29.914 R24.2@8.753,30.051 ; U3.47@23.619,30.171 23.644,30.196 25.116,30.196 v1(25.146,30.226)
  Bottom Layer w0.25: v1(7.76,29.591) 8.238,29.113 10.13,29.113 13.275,25.968 17.51,25.968 19.676,28.134 22.547,28.134 24.639,30.226 v1(25.146,30.226)
SPI1_CS: R22.1 U3.28 U5.1 | length 22.1
  Top Layer w0.2: U3.28@23.619,39.671 23.659,39.711 25.36,39.711 v1(25.4,39.751) ; v1(40.767,43.688) 40.767,43.69 41.021,43.944 R22.1@41.021,44.508 41.196,44.333 41.303,44.333 41.313,44.323 41.91,44.323 42.184,44.049 42.64,44.049 U5.1@42.719,43.97
  Bottom Layer w0.2: v1(25.4,39.751) 25.87,39.281 36.477,39.281 37.661,40.465 37.661,40.524 40.767,43.63 v1(40.767,43.688)
SPI1_MISO: U3.90 U5.2 | length 12.4
  Top Layer w0.2: U3.90@39.119,35.671 38.116,35.671 37.338,36.449 37.338,40.084 38.619,41.365 38.619,41.413 40.226,43.02 U5.2@42.719,43.02
SPI1_MOSI: U3.91 U5.5 | length 9.8
  Top Layer w0.2: U3.91@39.119,36.171 40.496,36.171 44.613,40.289 45.972,40.289 46.409,40.726 46.409,41.01 46.519,41.12 U5.5@46.689,41.12
SPI1_SCLK: U3.89 U5.6 | length 12.3
  Top Layer w0.2: U3.89@39.119,35.171 40.124,35.171 44.45,39.497 46.08,39.497 47.498,40.915 47.498,41.431 46.859,42.07 U5.6@46.689,42.07
SPI2_CS: R19.1 U3.51 U4.12 | length 7.7
  Top Layer w0.25: U4.12@20.05,23.039 20.05,23.159 20.666,23.775 R19.1@21.767,23.775 21.821,23.829 21.821,24.425 21.967,24.571 22.348,24.571 22.374,24.545 22.941,24.545 v1(22.989,24.498) ; v1(24.963,26.472) 25.344,26.472 25.369,26.497 U3.51@25.369,26.921
  Bottom Layer w0.25: v1(22.989,24.498) v1(24.963,26.472)
SPI2_MISO: U3.53 U4.1 | length 22.2
  Top Layer w0.25: U4.1@18.385,22.874 18.007,22.874 16.891,21.758 16.891,19.431 19.05,17.272 22.657,17.272 26.475,21.09 26.475,26.105 26.394,26.186 26.394,26.896 U3.53@26.369,26.921
SPI2_MOSI: U3.54 U4.14 | length 11
  Top Layer w0.25: U4.14@19.05,23.039 19.05,23.622 21.221,25.793 22.237,25.793 22.978,26.534 23.419,26.534 24.731,27.846 26.654,27.846 26.844,27.656 26.844,26.946 U3.54@26.869,26.921
SPI2_SCLK: R16.2 U4.13 | length 6.6
  Top Layer w0.25: U4.13@19.55,23.039 19.55,23.417 21.475,25.343 24.83,25.343 R16.2@24.9,25.273
SPI4_MISO: U3.43 U6.10 U6.15 | length 11.8
  Top Layer w0.25: U6.15@14.375,30.331 14.375,30.761 14.89,31.275 15.202,31.587 16.769,31.587 17.36,30.996 ; U6.10@16.875,30.331 16.875,30.761 17.11,30.996 17.36,30.996 ; U3.43@23.619,32.171 20.852,32.171 19.677,30.996 17.36,30.996
SPI4_MOSI: U3.44 U6.9 | length 6.8
  Top Layer w0.25: U6.9@17.375,30.331 19.649,30.331 20.989,31.671 U3.44@23.619,31.671
SPI4_SCLK: R15.2 U6.8 | length 5.1
  Top Layer w0.25: U6.8@17.79,31.496 18.806,31.496 21.076,33.766 R15.2@21.971,33.766
SWCLK: J2.3 U3.76 | length 23.1
  Top Layer w0.2: J2.3@26.035,16.126 26.035,17.51 26.416,17.891 v1(26.416,17.907) ; U3.76@39.119,28.671 39.135,28.687 40.752,28.687 v1(40.767,28.702)
  Bottom Layer w0.2: v1(26.416,17.907) 31.242,22.733 34.036,22.733 36.418,25.115 36.418,26.263 38.857,28.702 v1(40.767,28.702)
SWDIO: J2.2 U3.72 | length 18.6
  Top Layer w0.2: J2.2@27.035,16.126 27.117,16.208 27.117,17.084 28.067,18.034 28.067,20.32 30.226,22.479 v1(30.226,23.622) ; v1(35.687,28.067) 35.687,27.993 35.869,27.811 U3.72@35.869,26.921
  Bottom Layer w0.25: v1(30.226,23.622) 33.401,23.622 35.687,25.908 v1(35.687,28.067)
UART3_RX: J9.2 pad.MH15@61.595,26.035 U3.56 | length 36
  Top Layer w0.25: U3.56@27.869,26.921 27.894,26.946 27.894,27.656 28.998,28.76 36.74,28.76 38.068,27.432 45.339,27.432 45.796,26.975 57.098,26.975 57.627,26.446 J9.2@58.177,26.446 58.192,26.431 59.802,26.431 v1(59.817,26.416)
  Bottom Layer w0.25: v1(59.817,26.416) 59.885,26.416 60.266,26.035 pad.MH15@61.595,26.035
UART3_TX: J9.3 pad.MH15@61.595,27.432 U3.55 | length 36.5
  Top Layer w0.25: U3.55@27.369,26.921 27.369,27.767 28.812,29.21 37.37,29.21 38.571,28.009 45.778,28.009 46.228,27.559 58.04,27.559 J9.3@58.177,27.696 58.352,27.521 59.279,27.521 59.368,27.432 v1(59.436,27.432)
  Bottom Layer w0.25: v1(59.436,27.432) pad.MH15@61.595,27.432
USART1_RX: J6.3 pad.MH14 U3.69 | length 37.4
  Top Layer w0.2: U3.69@34.369,26.921 34.379,26.931 34.379,27.821 34.544,27.986 v1(34.544,28.067) ; v1(34.544,30.674) 34.544,38.608 36.097,40.161 v1(36.527,40.161) ; J6.3@43.551,53.047 43.561,53.057 v1(43.561,54.61)
  Top Layer w0.5: pad.MH14@43.307,58.42 43.307,54.864 v1(43.561,54.61)
  Bottom Layer w0.2: v1(34.544,28.067) v1(34.544,30.674) ; v1(36.527,40.161) 36.579,40.161 38.25,41.832 38.403,41.832 40.068,43.497 40.068,51.117 v1(43.561,54.61)
USART1_TX: J6.2 pad.MH13 U3.68 | length 37.3
  Top Layer w0.2: v1(33.274,30.734) 33.274,38.227 35.306,40.259 v1(35.306,40.301) ; v1(33.542,28.067) 33.542,28.037 33.869,27.71 U3.68@33.869,26.921 ; v1(42.037,54.864) 42.037,54.836 42.301,54.572 J6.2@42.301,53.047
  Top Layer w0.5: v1(42.037,54.864) pad.MH13@42.037,58.42
  Bottom Layer w0.2: v1(33.274,30.734) 33.331,30.677 33.331,30.214 33.542,30.004 v1(33.542,28.067) ; v1(35.306,40.301) 35.348,40.301 37.973,42.926 37.973,50.8 v1(42.037,54.864)
USART2_RX: J4.2 pad.MH15@53.467,58.42 R11.2 | length 7.1
  Top Layer w0.2: R11.2@53.34,51.377 J4.2@53.34,53.097
  Top Layer w0.5: J4.2@53.34,53.097 53.34,53.647 53.467,53.774 pad.MH15@53.467,58.42
USB1_N: J1.A7 J1.B7 U1.1 | length 5.6
  Top Layer w0.206: U1.1@53.071,14.036 53.381,14.036 53.906,14.561 53.906,14.699 54.027,14.819 54.467,14.819 54.584,14.702 55.087,14.702 55.123,14.666 55.777,14.666 J1.B7@55.824,14.619 56.249,14.619 56.369,14.739 56.494,14.739 56.629,14.874 56.629,15.364 56.421,15.572 55.871,15.572 J1.A7@55.824,15.619
USB1_P: J1.A6 J1.B6 U1.3 | length 5.6
  Top Layer w0.206: U1.3@53.071,15.936 53.381,15.936 53.906,15.411 53.906,15.273 54.027,15.153 54.605,15.153 54.722,15.036 55.087,15.036 55.123,15.072 55.777,15.072 J1.A6@55.824,15.119 55.399,15.119 55.279,15.239 55.154,15.239 55.019,15.374 55.019,15.864 55.227,16.072 55.777,16.072 J1.B6@55.824,16.119
USB4_N: R1.1 U1.6 | length 20.8
  Top Layer w0.206: R1.1@34.417,24.519 34.52,24.416 34.828,24.416 34.949,24.295 34.949,23.934 35.265,23.619 37.251,23.619 44.82,16.05 46.755,16.05 47.986,14.819 49.605,14.819 49.726,14.699 49.726,14.561 50.251,14.036 U1.6@50.561,14.036
USB4_P: R7.1 U1.4 | length 20.2
  Top Layer w0.206: R7.1@35.814,24.519 35.711,24.416 35.403,24.416 35.282,24.295 35.282,24.072 35.403,23.952 37.389,23.952 44.958,16.383 46.893,16.383 48.124,15.153 49.605,15.153 49.726,15.273 49.726,15.411 50.251,15.936 U1.4@50.561,15.936
USB_N: R1.2 U3.70 | length 1.8
  Top Layer w0.206: R1.2@34.417,25.519 34.52,25.622 34.828,25.622 34.952,25.747 34.952,26.159 34.916,26.195 34.916,26.874 U3.70@34.869,26.921
USB_P: R7.2 U3.71 | length 1.8
  Top Layer w0.206: U3.71@35.369,26.921 35.322,26.874 35.322,26.195 35.286,26.159 35.286,25.747 35.406,25.626 35.707,25.626 R7.2@35.814,25.519
VBAT: D9.2 D10.1 J7.1 pad.MH11 | length 15.9
  Top Layer w0.5: v1(4.318,6.35) 4.052,6.616 3.544,6.616 pad.MH11@2.794,7.366 3.048,7.62 v1(4.445,7.62) ; v1(9.144,8.001) 9.144,8.922 J7.1@9.271,9.049 10.545,9.049 10.795,8.799 v1(10.795,7.874) ; v1(12.446,4.191) 12.455,4.182 13.357,4.182 14.187,3.352 D10.1@14.187,3.302 14.187,3.252 12.967,2.032 v1(12.7,2.032) ; v1(12.954,7.239) 13.068,7.239 14.427,8.598 D9.2@14.427,8.89 14.427,9.076 13.598,9.906 v1(12.954,9.906)
VBUS: C1.1 C2.1 C48.1 FL1.2 R38.2 U1.5 U8.2 U8.2_1 | length 19.1
  Top Layer w0.4: U8.2_1@43.242,4.678 U8.2@43.242,4.953 43.242,6.558 43.467,6.783 C48.1@43.467,6.858 ; C48.1@43.467,6.933 43.775,7.241 43.775,7.345 44.174,7.745 44.317,7.887 44.317,8.103 R38.2@44.342,8.128
  Top Layer w0.5: R38.2@44.349,8.135 44.349,8.897 C2.1@44.831,9.379 46.128,9.379 46.203,9.304 C1.1@46.228,9.304 47.425,9.304 47.595,9.474 FL1.2@47.625,9.474 47.655,9.474 48.539,8.59 50.655,8.59 50.889,8.824 51.562,9.497 51.562,14.648 51.269,14.941 50.606,14.941 U1.5@50.561,14.986
VDD_5V: C3.1 C4.1 C5.1 C6.1 C49.2 C59.1 D2.1 D3.1 D4.1 D12.1 FL2.2 FL3.1 J4.1 J6.1 J9.1 pad.MH12 pad.MH15@55.118,58.42 pad.MH15@61.595,24.638 R13.1 R14.1 U2.3 U8.1 U8.1_1 U8.8 U8.8_1 | length 33.6
  Top Layer w0.25: U8.8_1@43.942,3.878 U8.1_1@43.942,4.678
  Top Layer w0.4: v1(34.925,6.985) 34.944,7.004 34.944,7.22 FL3.1@35.179,7.455 ; U8.8_1@43.942,3.878 43.942,2.921 v1(44.196,2.667) v1@44.177,2.686 ; U8.1@43.942,4.953 v1(43.942,5.842)
  Top Layer w0.5: v1(35.179,52.451) C5.1@35.179,53.321 ; v1(37.211,51.816) 37.211,52.627 D4.1@37.338,52.754 ; v1(40.132,53.975) 40.46,53.647 41.001,53.647 41.051,53.597 J6.1@41.051,53.047 ; v1(40.259,57.658) 40.39,57.789 40.39,58.17 pad.MH12@40.64,58.42 ; C49.2@45.72,2.38 46.642,2.38 v1(46.736,2.286) ; U2.3@48.133,32.3 48.133,32.65 49.138,33.655 51.562,33.655 v1(51.816,33.401) ; C3.1@48.387,30.32 49.605,30.32 C4.1@49.657,30.372 50.692,30.372 v1(51.308,30.988) ; v1(52.959,24.003) 53.349,24.393 53.965,24.393 C6.1@53.975,24.403 ; v1(54.483,54.483) 54.54,54.426 54.54,53.147 J4.1@54.59,53.097 ; v1(54.991,28.702) 55.859,29.57 R14.1@55.859,30.226 55.838,30.247 R13.1@55.838,31.496 ; v1(54.991,57.531) 54.991,58.293 pad.MH15@55.118,58.42 ; v1(55.372,25.654) 55.393,25.633 55.393,24.822 D12.1@55.753,24.462 ; FL2.2@56.261,44.755 56.281,44.775 56.84,44.775 v1(57.023,44.958) ; v1(56.515,49.911) 56.534,49.93 C59.1@56.534,50.927 ; v1(57.531,49.022) 58.132,49.022 59.182,50.072 D2.1@59.182,50.087 ; v1(58.166,45.72) 58.166,46.56 D3.1@58.342,46.736 ; J9.1@58.177,25.196 58.727,25.196 59.031,24.892 v1(59.309,24.892)
  Bottom Layer w0.5: v1(59.309,24.892) 59.563,24.638 pad.MH15@61.595,24.638
pads on no net: A1.6 D8.5 J1. J1.A8 J1.B8 U3.1 U3.2 U3.3 U3.4 U3.5 U3.15 U3.16 U3.17 U3.18 U3.30 U3.31 U3.32 U3.33 U3.34 U3.35 U3.36 U3.41 U3.45 U3.57 U3.58 U3.61 U3.62 U3.63 U3.67 U3.77 U3.80 U3.85 U3.86 U3.88 U3.92 U3.93 U3.98 U4.2 U4.3 U4.9 U4.10 U4.11 U6.1 U6.13 U6.16 U7.6 U7.11 U8.9 U9. Y1.2 Y1.4

## Polygon pours and split planes (outlines as drawn)
GND on Bottom Layer "GND_L04_P001" (solid, remove dead copper, pour order 1): 6.35,59.436 6.35,54.61 0.889,54.61 0.889,5.842 1.016,5.715 5.461,5.715 5.461,1.778 5.461,0.508 58.293,0.635 58.293,5.334 63.246,5.334 63.246,54.61 58.293,54.61 58.293,59.499
GND on Top Layer "GND_L01_P000" (solid, remove dead copper, pour order 0): 11.303,0.508 11.303,1.016 11.303,12.065 30.226,12.065 30.226,17.526 41.148,17.526 41.148,12.827 50.292,12.827 50.165,0.508
no net on POWER (split plane): 0.51,2.962 0.509,2.984 0.51,2.994
VBAT on POWER (split plane): 25.401,9.271 25.401,1.014 5.707,1.014 2.032,1.014 2.005,1.014 1.898,1.021 1.767,1.047 1.641,1.09 1.521,1.149 1.41,1.223 1.31,1.311 1.222,1.412 1.148,1.523 1.089,1.642 1.046,1.769 1.02,1.9 1.014,1.985 1.014,11.306 25.401,11.431
+3V3_ANALOG on POWER (split plane): 29.465,48.389 29.465,42.79 20.312,42.543 20.284,42.539 20.256,42.535 20.252,42.533 20.247,42.533 20.221,42.521 20.195,42.51 20.191,42.508 20.187,42.506 20.165,42.488 20.142,42.471 20.139,42.467 20.136,42.464 20.119,42.441 20.102,42.419 20.1,42.415 20.097,42.411 20.087,42.384 20.076,42.358 20.075,42.354 20.074,42.35 20.071,42.321 20.067,42.293 19.94,24.513 19.94,24.512 19.94,24.511 19.944,24.479 19.948,24.447 19.949,24.446 19.961,24.416 19.973,24.386 19.974,24.385 19.993,24.36 20.013,24.334 20.013,24.333 20.014,24.333 20.039,24.313 20.065,24.293 20.066,24.293 20.096,24.28 20.125,24.268 20.126,24.268 20.127,24.267 20.159,24.263 20.19,24.259 20.191,24.259 20.192,24.259 26.163,24.259 26.163,16.891 26.167,16.86 26.171,16.829 26.171,16.827 26.172,16.826 26.183,16.797 26.195,16.768 26.196,16.767 26.197,16.765 26.216,16.74 26.234,16.715 26.236,16.714 26.237,16.713 26.262,16.694 26.286,16.674 26.288,16.674 26.289,16.673 26.318,16.661 26.346,16.648 26.348,16.648 26.35,16.647 26.381,16.643 26.412,16.639 35.053,16.515 35.053,9.906 35.053,9.777 25.905,9.777 25.905,11.684 25.905,11.685 25.901,11.717 25.897,11.749 25.896,11.75 25.884,11.78 25.872,11.81 25.871,11.811 25.851,11.837 25.831,11.862 25.831,11.863 25.805,11.883 25.779,11.902 25.779,11.903 25.778,11.903 25.748,11.915 25.718,11.928 25.717,11.928 25.685,11.932 25.653,11.936 25.652,11.936 1.014,11.81 1.006,48.389
+3V3_MAIN on POWER (split plane): 160 vertices, not listed, extent 0.51,9.777 50.674,59.463
no net on POWER (split plane): 2.984,0.509 2.963,0.51 2.993,0.51
no net on POWER (split plane): 61.016,0.509 61.007,0.51 61.037,0.51
BEC_5V on POWER (split plane): 32.894,6.223 32.903,6.158 32.928,6.097 32.968,6.045 33.02,6.005 33.081,5.979 33.146,5.971 41.53,5.971 41.53,4.572 41.539,4.507 41.564,4.446 41.604,4.394 41.656,4.354 41.717,4.328 41.782,4.32 43.562,4.32 43.562,1.014 25.905,1.014 25.905,9.271 25.905,9.273 32.894,9.273
no net on POWER (split plane): 43.873,0.51 43.819,0.51 43.846,0.514
VDD_5V on POWER (split plane): 61.952,59.206 62.117,59.177 62.278,59.131 62.322,59.113 62.436,59.04 62.608,58.908 62.769,58.761 62.916,58.6 63.048,58.428 63.165,58.244 63.211,58.156 63.241,58.054 63.247,58.017 63.247,2.032 63.247,1.925 63.158,1.754 63.041,1.571 62.909,1.398 62.762,1.238 62.602,1.091 62.501,1.014 61.848,1.014 44.066,1.014 44.066,4.572 44.058,4.637 44.033,4.698 43.992,4.75 43.94,4.79 43.879,4.816 43.814,4.824 42.034,4.824 42.034,6.223 42.026,6.288 42.001,6.349 41.96,6.401 41.908,6.441 41.847,6.467 41.782,6.475 33.398,6.475 33.398,9.273 43.306,9.273 43.371,9.281 43.432,9.307 43.484,9.347 43.525,9.399 43.55,9.46 43.558,9.525 43.558,12.309 48.64,12.309 48.666,12.312 48.705,12.317 48.72,12.324 48.766,12.343 48.787,12.358 48.818,12.383 48.843,12.414 48.859,12.435 48.878,12.481 48.884,12.496 48.889,12.535 48.892,12.561 48.892,18.544 50.926,18.544 50.991,18.552 51.052,18.578 51.104,18.618 51.145,18.67 51.17,18.731 51.178,18.796 51.178,50.292 51.17,50.357 51.145,50.418 51.104,50.47 51.052,50.51 50.991,50.536 50.926,50.544 33.906,50.544 33.906,59.184 61.467,59.184 61.513,59.19 61.513,59.188 61.617,59.206 61.785,59.215
GND on GND (split plane): 61.222,59.482 61.437,59.454 61.65,59.407 61.858,59.341 62.059,59.258 62.252,59.157 62.436,59.04 62.608,58.908 62.769,58.761 62.916,58.6 63.048,58.428 63.165,58.244 63.266,58.051 63.349,57.85 63.415,57.642 63.462,57.429 63.49,57.214 63.499,57.015 63.498,57 63.49,3 63.491,2.984 63.482,2.783 63.454,2.567 63.407,2.355 63.342,2.148 63.258,1.947 63.158,1.754 63.041,1.571 62.909,1.398 62.762,1.238 62.602,1.091 62.429,0.959 62.246,0.842 62.053,0.742 61.852,0.658 61.645,0.593 61.433,0.546 61.217,0.518 61.016,0.509 61,0.51 3,0.51 2.984,0.509 2.783,0.518 2.567,0.546 2.355,0.593 2.148,0.658 1.947,0.742 1.754,0.842 1.571,0.959 1.398,1.091 1.238,1.238 1.091,1.398 0.959,1.571 0.842,1.754 0.742,1.947 0.658,2.148 0.593,2.355 0.546,2.567 0.518,2.783 0.509,2.984 0.51,3 0.51,57 0.51,57.008 0.517,57.187 0.545,57.4 0.592,57.61 0.657,57.815 0.739,58.013 0.838,58.204 0.954,58.385 1.085,58.556 1.23,58.714 1.388,58.859 1.559,58.99 1.74,59.106 1.931,59.205 2.129,59.287 2.334,59.352 2.544,59.398 2.757,59.427 2.972,59.436 2.979,59.436 2.995,59.434 3,59.434 61,59.49 61.018,59.491

## Other copper
POWER (plane layer: these items are gaps in the copper):
  lines w0.15: 0.754,11.557 0.761,2.032 ; 0.762,1.975 ccw(c1.94,1.94) 1.905,0.762 5.707,0.762 25.272,0.762 26.161,0.762 ; 25.272,11.684 24.891,11.684 ; 25.653,9.525 33.146,9.525 ; 35.305,9.525 35.305,9.906 35.305,16.764 26.415,16.891 26.415,24.511 20.192,24.511 20.319,42.291 29.717,42.545 29.717,48.641 4.317,48.641 1.046,48.641 0.754,48.641 0.762,11.557 9.652,11.557 24.891,11.684 ; 24.891,11.684 25.082,11.684 25.653,11.684 25.653,9.271 25.653,0.762 43.814,0.762 ; 33.146,9.525 33.527,9.525 43.306,9.525 43.306,11.938 43.306,12.561 48.64,12.561 48.64,18.796 50.926,18.796 50.926,22.225 50.926,50.292 33.654,50.292 33.654,59.436 58.673,59.436 61.467,59.436 cw(c61.785,57.721) 63.499,58.039 63.499,2.54 63.499,0.762 61.848,0.762 44.068,0.762 43.814,0.762 ; 33.146,9.525 33.146,9.144 33.146,6.223 36.321,6.223 41.782,6.223 41.782,4.572 43.814,4.572 43.814,0.762
  lines w0.5: 0.754,11.557 25.653,11.684 25.653,9.271 25.653,0.762 ; 0.761,2.032 ccw(c2.031,2.033) 2.032,0.762 ; 0.762,1.905 0.762,11.557 0.754,48.641 29.717,48.641 29.717,42.545 20.319,42.291 20.192,24.511 26.415,24.511 26.415,16.891 35.305,16.764 35.305,9.906 35.305,9.525 ; 1.905,0.762 5.707,0.762 25.653,0.762 ; 25.653,9.525 33.146,9.525 ; 43.878,0.762 61.848,0.762 63.499,0.762 63.499,2.032 63.499,58.039 ccw(c61.785,57.721) 61.467,59.436 33.654,59.436 33.654,50.292 50.926,50.292 50.926,18.796 48.64,18.796 48.64,12.561 43.306,12.561 43.306,9.525 33.527,9.525 33.146,9.525 ; 25.653,0.762 43.814,0.762 43.814,4.572 41.782,4.572 41.782,6.223 33.146,6.223 33.146,9.525

## Silkscreen, mask and mechanical layers (free items; w line width, h text height)
Top Overlay:
  text "RX  GND" at 45.72,58.428 h0.75
  text "5V  TX" at 37.719,58.301 h0.75
  text "RX 5V" at 56.134,58.301 h0.75
  text "GND" at 49.784,58.174 h0.75
  text "NRST" at 32.647,57.658 h0.75 r270
  text "BOOT" at 23.884,57.404 h0.75 r270
  text "Telem" at 47.254,55.88 h1 r270
  text "Reciever" at 49.393,53.467 h1 r90
  text "RELIA-H7" at 1.397,38.481 h3 r270
  text "CAN" at 62.738,35.676 h1 r180
  text "PWM4" at 1.143,26.162 h0.75 r270
  text "PWM3" at 1.151,23.495 h0.75 r270
  text "I2C UART" at 62.357,22.089 h0.8 r180
  text "PWM2" at 1.143,20.955 h0.75 r270
  text "PWM1" at 1.143,18.415 h0.75 r270
  text "RX" at 1.143,15.494 h0.75 r270
  text "DEBUGGING" at 21.712,13.589 h0.5 r90
  text "CURR" at 1.151,13.208 h0.75 r270
  text "GND" at 1.024,10.541 h0.75 r270
  text "VBAT" at 1.016,8.254 h0.75 r270
Bottom Overlay:
  text "5V  CANH  CANL  GND" at 62.984,43.053 h0.75 r90
  text "SCL SDA GND TX RX 5V" at 62.984,32.004 h0.75 r90
Mechanical 1:
  the board outline again, w0.5